# EAGLE board BiodataModular_006_JelFace (EAGLE 9.6.2)
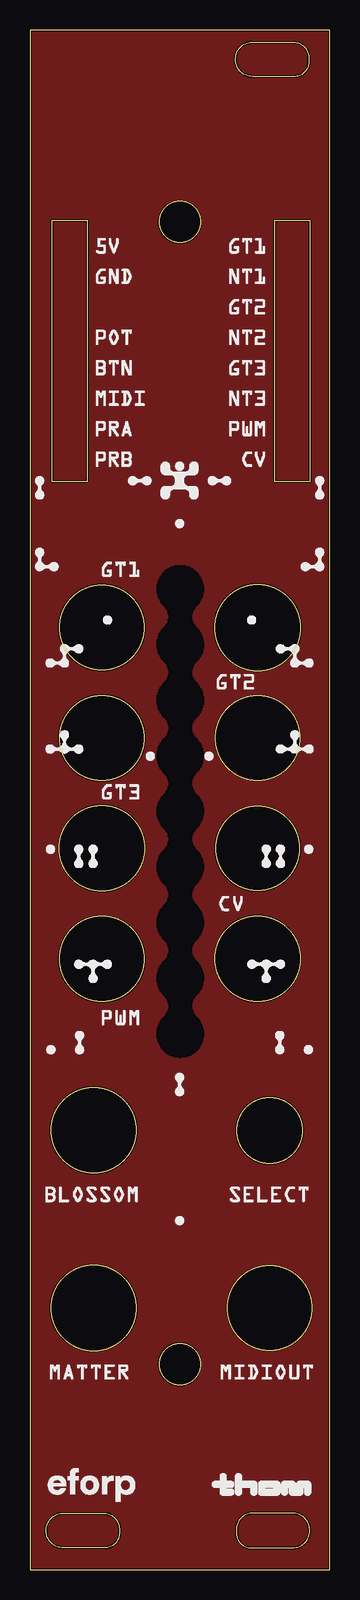
[diagram p0: board, top side]
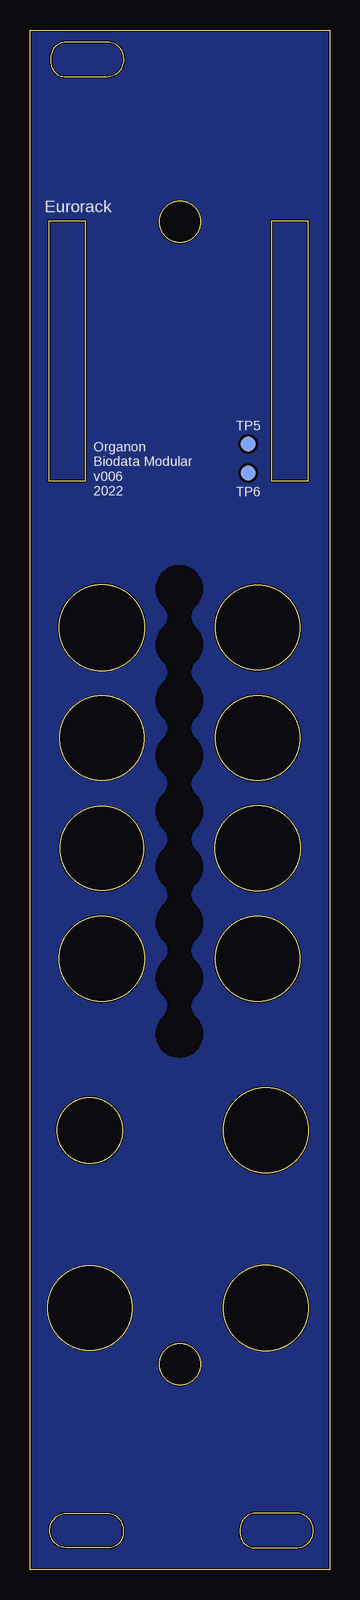
[diagram p1: board, bottom side, seen from below]

Size 25 x 128.3 mm. Coordinates in mm from the lower left corner, seen from the top.
Outline: 0,0 25,0 25,128.3 0,128.3 0,0
Outline: 22.16,124.42 18.56,124.42 arc-90 17.16,125.82 arc-90 18.46,127.29 22.04,127.29 arc-90 23.26,125.9 23.26,125.72 arc-90 22.16,124.42
Outline: 6.36,1.82 2.76,1.82 arc-90 1.36,3.22 arc-90 2.66,4.69 6.24,4.69 arc-90 7.46,3.3 7.46,3.12 arc-90 6.36,1.82
Outline: 18.34,1.82 21.94,1.82 arc90 23.34,3.22 arc90 22.04,4.69 18.46,4.69 arc90 17.24,3.3 17.24,3.12 arc90 18.34,1.82
Outline: 1.8,90.7 4.8,90.7 4.8,112.4 1.8,112.4 1.8,90.7
Outline: 20.4,90.7 23.4,90.7 23.4,112.4 20.4,112.4 20.4,90.7
Outline: circle at 12.5,112.3 radius 1.7
Outline: circle at 12.5,17.1 radius 1.7
Outline: circle at 6,78.5 radius 3.52
Outline: circle at 19,78.5 radius 3.57
Outline: circle at 6,69.3 radius 3.51
Outline: circle at 19,69.3 radius 3.49
Outline: circle at 6,60.1 radius 3.54
Outline: circle at 19,60.1 radius 3.49
Outline: circle at 6,50.9 radius 3.52
Outline: circle at 19,50.9 radius 3.54
Outline: circle at 5.3,21.8 radius 3.54
Outline: circle at 20,21.8 radius 3.49
Outline: circle at 5.3,36.6 radius 3.54
Outline: circle at 20,36.6 radius 2.73
Copper layers (1*16): Top 0.035mm / dielectric 1.5mm / Bottom 0.035mm
Design rules "default *": minimum track width 10mil, minimum drill 24mil, track to track 8mil, track to pad 8mil, pad to pad 8mil, via to via 8mil, smd to smd 8mil, copper to edge 5mil, drill to drill 8mil, minimum pad ring 10mil, minimum via ring 8mil, stop-mask expansion 4mil, vias tented up to drill 0mil, thermal gap 15mil
tRestrict: area 12.4,42.6 to 12.6,42.7; area 12,42.7 to 13.1,42.8; area 11.7,42.8 to 13.4,42.9; area 11.6,42.9 to 13.5,43; area 11.4,43 to 13.6,43; area 11.3,43 to 13.8,43.1; area 11.2,43.1 to 13.9,43.2; area 11.1,43.2 to 13.9,43.3; area 11.1,43.3 to 14,43.4; area 11,43.4 to 14.1,43.5; area 10.9,43.5 to 14.2,43.5; area 10.9,43.5 to 14.2,43.6; 473 more areas
bRestrict: area 12.4,42.6 to 12.6,42.7; area 12,42.7 to 13.1,42.8; area 11.7,42.8 to 13.4,42.9; area 11.6,42.9 to 13.5,43; area 11.4,43 to 13.6,43; area 11.3,43 to 13.8,43.1; area 11.2,43.1 to 13.9,43.2; area 11.1,43.2 to 13.9,43.3; area 11.1,43.3 to 14,43.4; area 11,43.4 to 14.1,43.5; area 10.9,43.5 to 14.2,43.5; area 10.9,43.5 to 14.2,43.6; 473 more areas

## Footprints (pad centres in the part's own frame; a part is rotated, then mirrored left to right if it is on the bottom)
B1,27 = smd 1.27 x 1.27: TP 0,0

## Placement (x,y rotation side)
TP5  TPB1,27  [B1,27]  6.8,93.8 0 bottom
TP6  TPB1,27  [B1,27]  6.8,91.4 0 bottom

## Library data of the parts
TP5 TP6 = testpad

## Nets
PROBE1C1: TP6.TP
PROBE2C1: TP5.TP

## Tracks (layer width: path | path; a pad name or v marks a point on that pad's centre or on a via)
N$4
  pour Top: 0,0 25,0 24.9,128.2 0.1,128.2
N$6
  pour Bottom: 24.9,0 24.9,128.2 0.1,128.2 0.1,0

## Text on the board
bNames: Eurorack | Organon / Biodata Modular / v006 / 2022